# Altium PCB PCB2.PcbDoc
Units mm, origin at the board's own origin, x right, y up, seen from the top; angles counter-clockwise.
Board outline 60 x 48 mm, 2 copper layers (Top Layer, Bottom Layer), stack 1.671 mm thick; 18 components, 9 nets, 37 pads, 0 vias.
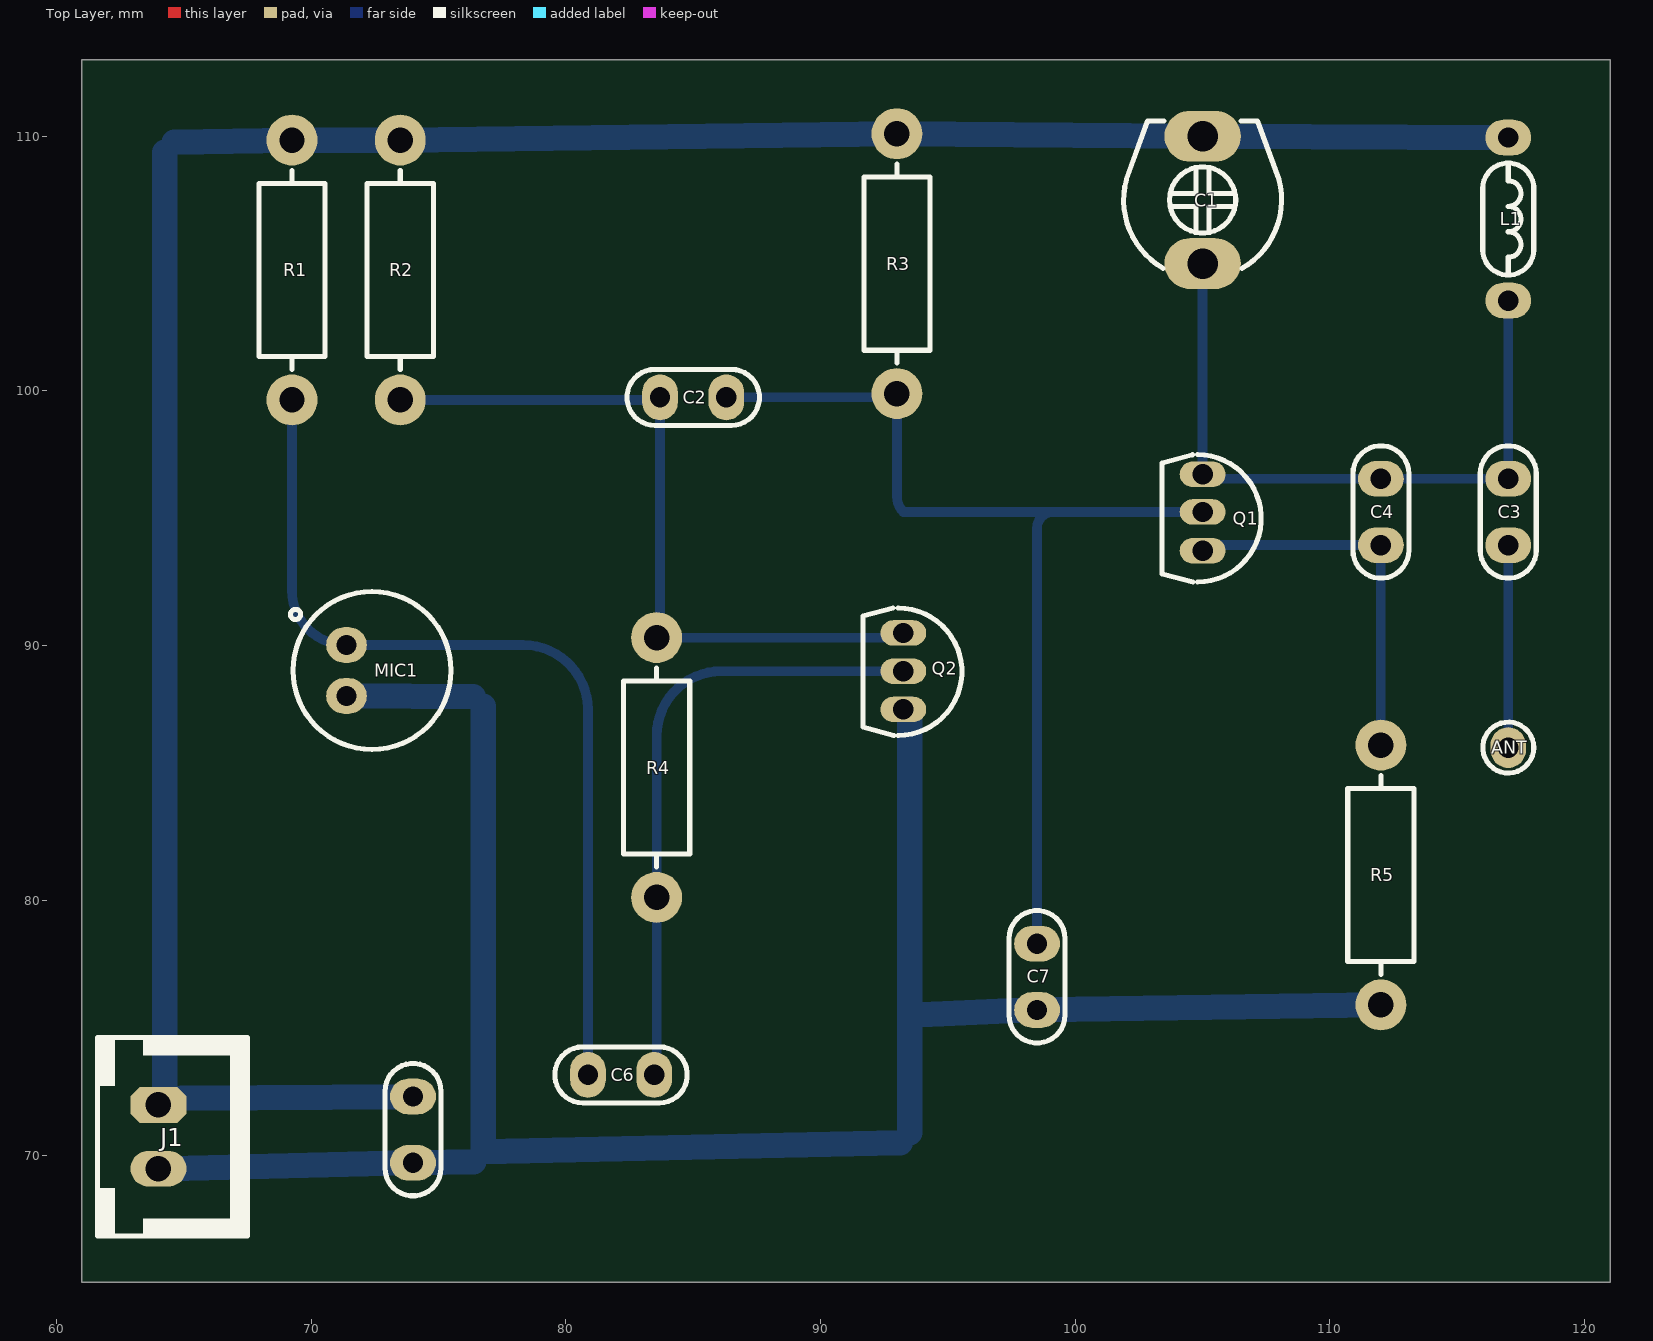
[diagram p0: Top Layer view]
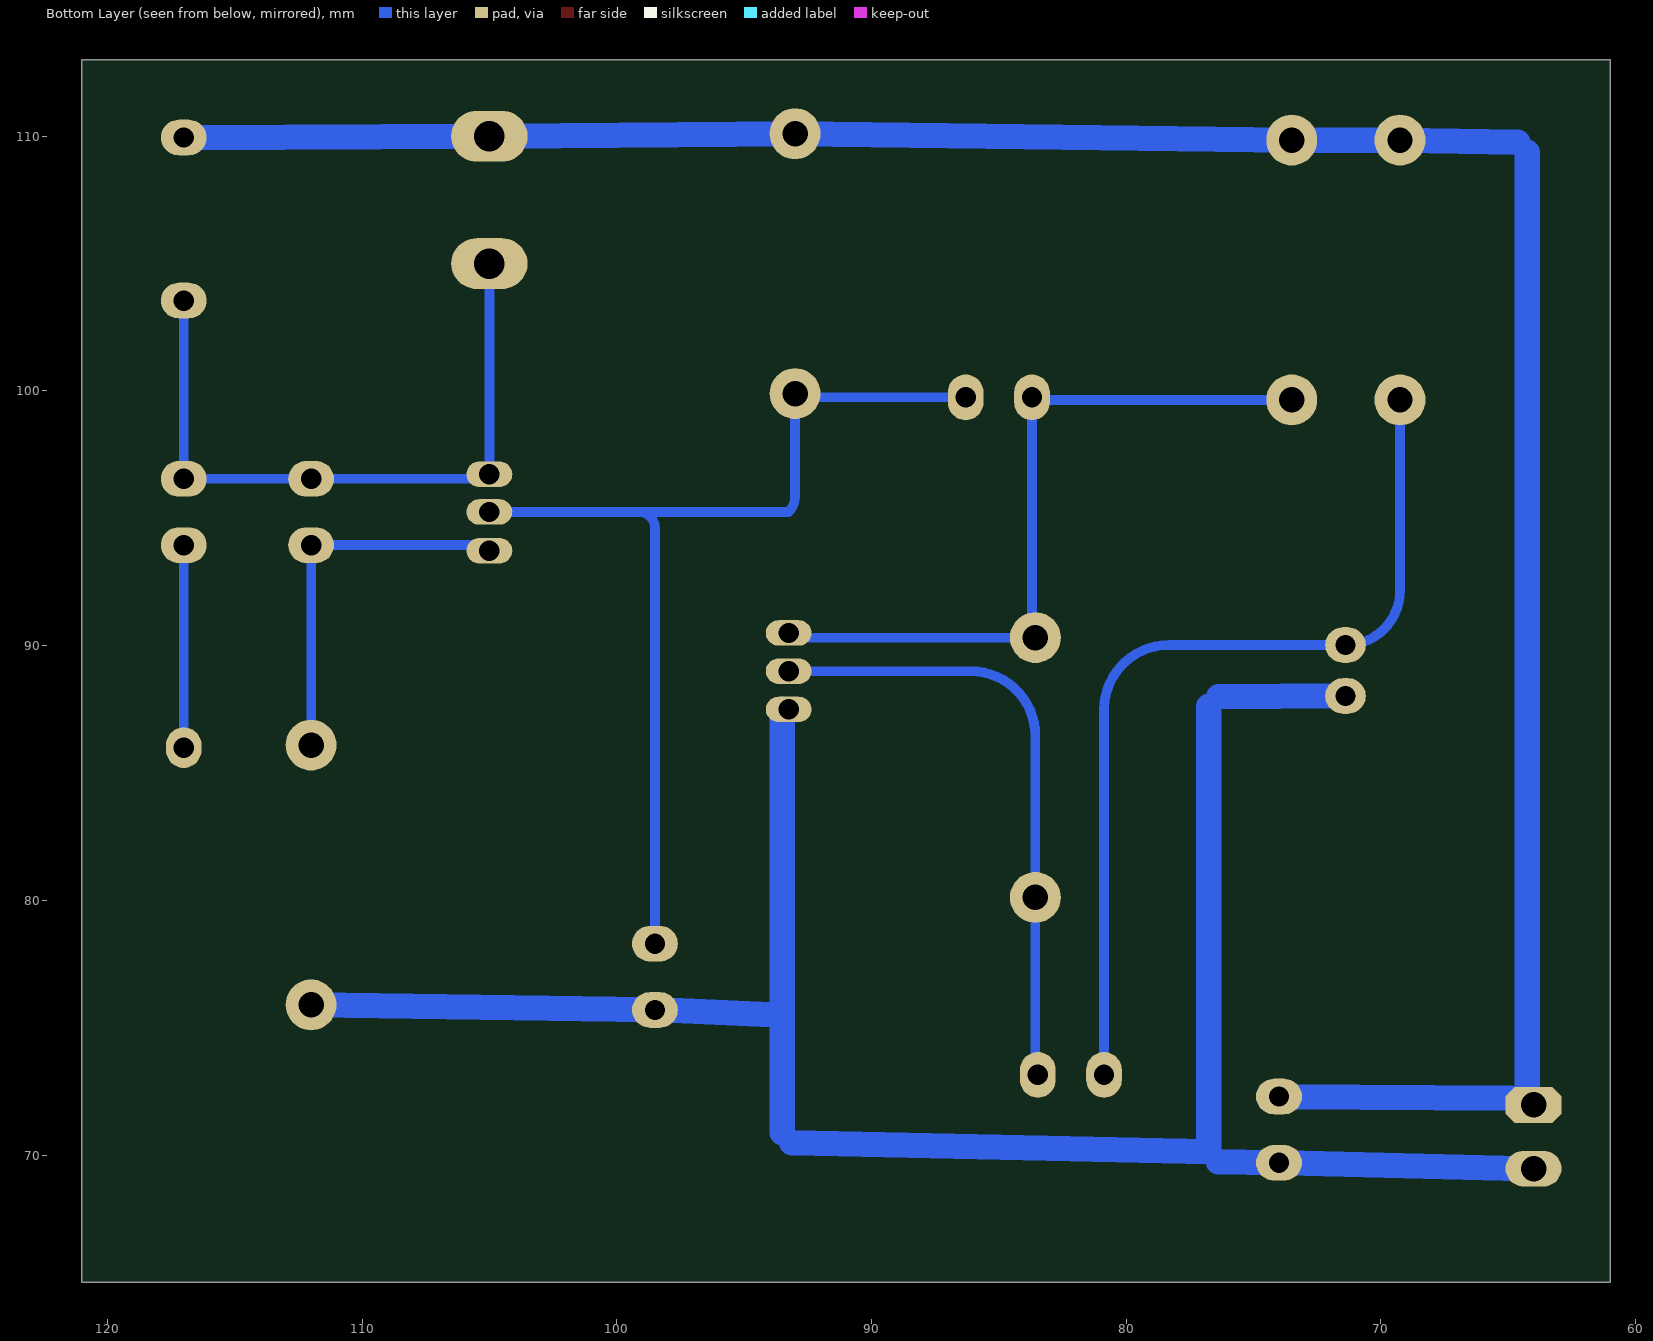
[diagram p1: Bottom Layer view, seen from below]
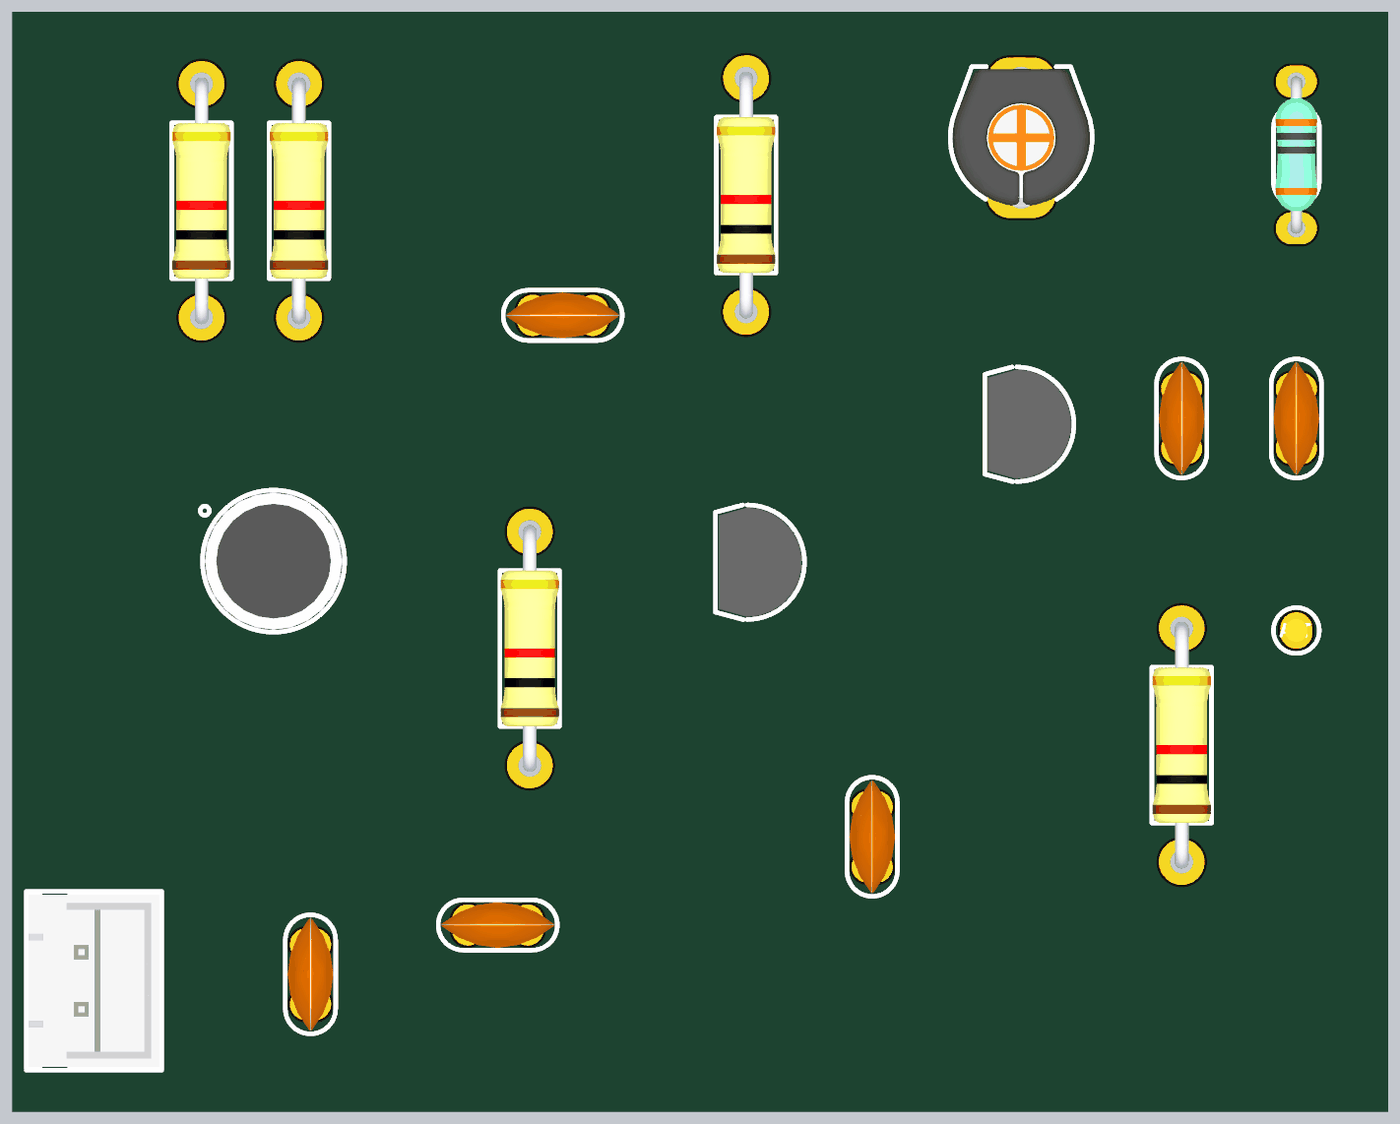
[diagram p2: 3D render of the assembled board from above, using the file's embedded part models]

## Layer stack, top to bottom
Top Solder: solder mask 0.0102, Solder Resist, Dk 3.5
Top Layer: signal copper 0.0356
Dielectric 1: dielectric 1.6, FR-4, Dk 4.8
Bottom Layer: signal copper 0.0356
Bottom Solder: solder mask 0.0102, Solder Resist, Dk 3.5

## Board outline
61,65 121,65 121,113 61,113

## Design rules (kind name [scope] priority, off if disabled: settings)
Clearance [All] p1: gap=0.3 ignorepadtopadclearanceinfootprint=FALSE except(0.4: Arc-Fill Arc-Poly Arc-Region Track-Fill Track-Poly Track-Region SMDPad-Fill SMDPad-Poly SMDPad-Region THPad-Fill THPad-Poly THPad-Region Via-Fill Via-Poly Via-Region Fill-Fill Fill-Poly Fill-Region Fill-Text Poly-Poly Poly-Region Poly-Text Region-Region Region-Text)
PolygonConnect [All] p1: thpad.connectstyle=Relief thpad.reliefconductorwidth=0.3 thpad.reliefentries=4 thpad.polygonreliefangle="90 Angle" thpad.airgapwidth=0.3 thpad.conductorbypadedge=TRUE thpad.mindistance=0.381 thpad.enablemindistance=FALSE smdpad.connectstyle=Relief smdpad.reliefconductorwidth=0.3 smdpad.reliefentries=4 smdpad.polygonreliefangle="90 Angle" smdpad.airgapwidth=0.3 smdpad.conductorbypadedge=TRUE smdpad.mindistance=0.381 smdpad.enablemindistance=FALSE via.connectstyle=Direct via.reliefconductorwidth=0.254 via.reliefentries=4 via.polygonreliefangle="90 Angle" via.airgapwidth=0.254
RoutingVias [All] p1: holewidth=0.711 width=1.27 viastyle="Through Hole" minholewidth=0.711 minwidth=1.27 maxholewidth=0.711 maxwidth=1.27
SolderMaskExpansion [All] p1: expansion=0.102 istentingtop=FALSE
SupplyNets "Schematic Supply Nets_2" [InNet('GND')] p1: voltage=0.000
SupplyNets "Schematic Supply Nets_1" [InNet('ANT')] p2: voltage=0.000
SupplyNets "Schematic Supply Nets" [InNet('VCC')] p3: voltage=0.000
Width [All] p1: maxlimit=1 minlimit=0.3 preferedwidth=0.8 minimp=50.000000 maximp=50.000000 favimp=50.000000
30 further rules are at their usual default settings.

## Classes and differential pairs
component class Sheet2: ANT C2 C3 C4 C6 C7 J1 L1 MIC1 Q1 Q2 R1 R2 R3 R4 R5

## Components (designator, comment, footprint, x,y, rotation, side; value= is the part's Value field where it differs from the comment)
ANT "TESTPOINT_PROBE" TPTHD_A 117,86 r0 top value=VALUE
C1 "60pF" CTRM_6X6 105,107.5 r90 top
C2 "100nF" C_CER_D5 85,99.75 r180 top
C3 "27pF" C_CER_D5 117,95.25 r270 top
C4 "1uF" C_CER_D5 112,95.25 r90 top
C5 "22nF" C_CER_D5 74,71 r90 top
C6 "22nF" C_CER_D5 82.169,73.152 r180 top
C7 "1nF" C_CER_D5 98.5,77 r90 top
J1 "HHDR_2" XH_2 64.008,70.719 r270 top
L1 "0.1uH" LT_AX025 117,106.75 r270 top
MIC1 "MIC_WM52" MIC_C6 72.39,89.027 r0 top
Q1 "BC547" TO92_3#1 105,95 r270 top
Q2 "BC547" TO92_3#2 93.25,88.98 r270 top
R1 "22K" R025W_AX04 69.25,104.75 r90 top
R2 "10K" R025W_AX04 73.5,104.75 r90 top
R3 "43K" R025W_AX04 93,105 r90 top
R4 "1M" R025W_AX04 83.566,85.217 r90 top
R5 "330" R025W_AX04 112,81 r90 top

## Footprints (in the part's own frame and the unit in brackets; to place one, negate y for a bottom-side part, rotate by r counter-clockwise, add the part's x,y. Pads: shape width x height; smd on the part's side, far side on the other; paste and mask are expansions set on the pad)
C_CER_D5 [mm] "CAP, CER, D:5mm, pitch: 2.5mm"
  oval 1.4x1.8 hole 0.8: 1(-1.3,0) 2(1.3,0)
  silkscreen extent -2.6,-1.1 2.6,1.1, body extent -2.46,-1 2.46,1, height 5.45
CTRM_6X6 [mm] "CAP, TRIMMER, Murata TZ03"
  oval 2x3 hole 1.2: 1(-2.5,0) 2(2.5,0)
  silkscreen extent -2.68,-3.1 3.1,3.1, body extent -3,-3 3,3, height 4.8
LT_AX025 [mm] "INDUCTOR, Axial, 6.4mm,"
  oval 1.4x1.8 hole 0.8 mask+0.1: 1(-3.2,0) 2(3.2,0)
  silkscreen extent -2.2,-1 2.2,1, body extent -3.43,-0.92 3.43,0.92, height 1.92
MIC_C6 [mm] "MIC, WM-63PR, POM-3535P-3-R"
  oval 1.6x1.4 hole 0.8: 1(-1,1) 2(-1,-1)
  silkscreen extent -3.2,-3.1 3.1,3.1, body extent -3,-3 3,3, height 2.4
R025W_AX04 [mm] "RESISTOR 1/4 WATT, AXIAL0.4"
  round 2 hole 1: 1(-5.1,0) 2(5.1,0)
  silkscreen extent -3.9,-1.3 3.9,1.3, body extent -5.38,-1.28 5.38,1.28, height 2.6
TO92_3#1 [mm] "TO-92, SOT54"
  oval 1x1.8 hole 0.8 mask+0.1: 1(-1.73,0) 2(-0.25,0) 3(1.27,0)
  silkscreen extent -2.5,-1.59 2.5,2.3, body extent -2.38,-1.45 2.38,2.18, height 7.82
TO92_3#2 [mm] "TO-92, SOT54"
  oval 1x1.8 hole 0.8 mask+0.1: 1(-1.52,0) 2(-0.02,0) 3(1.48,0)
  silkscreen extent -2.5,-1.59 2.5,2.3, body extent -2.38,-1.45 2.38,2.18, height 7.82
TPTHD_A [mm] "TEST POINT, SMALLEST SIZE"
  oval 1.4x1.6 hole 0.8: 1(0,0)
  silkscreen extent -1,-1 1,1, body extent -0.5,-0.5 0.5,0.5, height 6.5
XH_2 [mm] "PW10-x-M, JST-BxB-XH-A pitch: 2.5mm, 3A/250v"
  oct 1.4x2.2 hole 1: 1(-1.25,0)
  oval 1.4x2.2 hole 1: 2(1.25,0)
  silkscreen extent -3.9,-2.4 3.9,3.5, body extent -3.75,-2.3 3.75,3.4, height 7

## Part data
ANT: "TEST POINT", MANF=MANF, MANF_P#=MANF_P#
C1: library part CAP_THD_TRIMMER, "CAP, THD, TRIMMER", ASSEMBLY=ASSEMBLY, DESC="CAP, SMD, TRIMMER", MANF=MANF, MANF_P#=MANF_PART#, PARAM=PARAM, PARAM2=PARAM2, PRICE="100= 1$"
C2 C3 C4 C5 C6 C7: library part CAP_THD_CER, "CAP, THD, CER MULTI LAYER,", ASSEMBLY=ASSEMBLY, DESC="CAP, CER MULTI LAYER,", MANF=MANF, MANF_P#=MANF_PART#, PARAM2=50V, PRICE="100= 1$"
J1: library part XH_2, "JST-XH pitch: 2.5mm"
L1: library part IND_THD, "INDUCTOR, THD"
MIC1: library part MIC_WM-52, "MICROPHONE OMNI", MANF_P#=WM52BM, PRICE=PRICE
Q1 Q2: library part NPN_BC547_TO92, "BJT, NPN, 45v, 0.1A, THD, TO92", MANF=FAIRCHILD, MANF_P#=BC547, PARAM="0.1A, Hfe110~800", PARAM2="45v, 500mW", Simulation ModelName=NS3904, Simulation PortMap=(1:1),(2:3),(3:3)
R1 R2 R3 R4 R5: library part RES_THD, "RESISTOR, THD", ASSEMBLY=ASSEMBLY, DESC=DESCRIPTION, DIST#=MOUSER, MANF="KOA SPEER", MANF_P#=RK73H1ETTP4701F, PARAM=0.063W, PARAM2=1%, PRICE="100= 0.5$"

## Nets (pads, with @x,y where several pads share a name; then routed paths per layer and width w, separated by ;. In a path a pad name is that pad's centre, name@x,y a point inside that pad or via, vN(x,y) a via of type N, cw(c..) or ccw(c..) an arc to the next point about the centre after c; other vN are vias at no path point)
ANT: ANT.1 C3.2 | length 7.9
  Bottom Layer w0.381: ANT.1 C3.2
GND: C5.1 C7.1 J1.2 MIC1.2 Q2.3 R5.1 | length 88.4
  Bottom Layer w0.381: J1.2 J1.2@64.408,69.469 ; MIC1.2 MIC1.2@71.49,88.027 ; C5.1@73.8,69.7 C5.1 C5.1@74.2,69.7 ; 76.371,88.002 cw(c76.369,87.621) 76.75,87.621 ; 76.377,69.743 ccw(c76.369,70.124) 76.75,70.124 ; 93.122,70.492 ccw(c93.113,70.872) 93.494,70.872 ; Q2.3 Q2.3@93.494,87.5 ; C7.1@98.3,75.7 C7.1 C7.1@98.7,75.7
  Bottom Layer w1: J1.2@64.408,69.469 C5.1@73.8,69.7 ; MIC1.2@71.49,88.027 76.371,88.002 ; C5.1@74.2,69.7 76.376,69.743 ; 76.75,87.621 76.75,70.124 93.122,70.492 ; 93.494,70.872 93.494,75.5 ; Q2.3@93.494,87.5 93.494,75.5 ; C7.1@98.3,75.7 93.494,75.5 ; C7.1@98.7,75.7 R5.1
NetC1_1: C1.1 C3.1 C4.2 L1.2 Q1.1 | length 27.3
  Bottom Layer w0.381: C1.1 Q1.1 ccw(c105.435,97.165) 105.435,96.55 C4.2 C3.1 L1.2
NetC2_1: C2.1 C7.2 Q1.2 R3.1 | length 40.5
  Bottom Layer w0.381: C2.1 92.638,99.75 ccw(c92.638,100.262) R3.1 93,95.854 ccw(c93.854,95.854) 93.25,95.25 99.125,95.25 ; C7.2 98.5,94.625 cw(c99.125,94.625) 99.125,95.25 ; Q1.2 99.125,95.25
NetC2_2: C2.2 Q2.1 R2.1 R4.2 | length 29.4
  Bottom Layer w0.381: R2.1 83.459,99.65 ccw(c83.459,99.991) C2.2 83.7,90.641 cw(c83.242,90.641) R4.2 92.808,90.317 ccw(c92.808,90.942) Q2.1
NetC4_1: C4.1 Q1.3 R5.2 | length 14.9
  Bottom Layer w0.381: Q1.3 cw(c105.531,93.199) 105.531,93.95 C4.1 R5.2
NetC6_1: C6.1 Q2.2 R4.1 | length 24.5
  Bottom Layer w0.381: C6.1 ccw(c83.235,73.386) 83.566,73.386 R4.1 83.566,86.46 cw(c86.106,86.46) 86.106,89 Q2.2
NetC6_2: C6.2 MIC1.1 R1.1 | length 36.1
  Bottom Layer w0.381: R1.1 69.25,92.167 ccw(c71.39,92.167) MIC1.1 78.329,90.027 cw(c78.329,87.487) 80.869,87.487 C6.2
VCC: C1.2 C5.2 J1.1 L1.1 R1.2 R2.2 R3.2 | length 100.5
  Bottom Layer w0.381: J1.1@64.248,72.479 J1.1 J1.1@64.918,72.24 ; 64.248,109.376 cw(c64.629,109.376) 64.621,109.757 ; C5.2@73.8,72.3 C5.2 ; C1.2@104.5,110 C1.2 C1.2@105.5,110 ; L1.1@116.8,109.95 L1.1
  Bottom Layer w1: J1.1@64.248,72.479 64.248,109.376 ; 64.621,109.757 R1.2 R2.2 R3.2 C1.2@104.5,110 ; J1.1@64.918,72.24 C5.2@73.8,72.3 ; C1.2@105.5,110 L1.1@116.8,109.95

## Silkscreen, mask and mechanical layers (free items; w line width, h text height)
Top Overlay:
  drawing of 402 lines, arcs and shapes, not listed